# Altium PCB LCD_Player_V1.1.PcbDoc
Units mil, origin at the board's own origin, x right, y up, seen from the top; angles counter-clockwise.
Board outline 1495.97 x 2694.13 mil, 2 copper layers (Top Layer, Bottom Layer); 17 components, 17 nets, 53 pads, 14 vias.
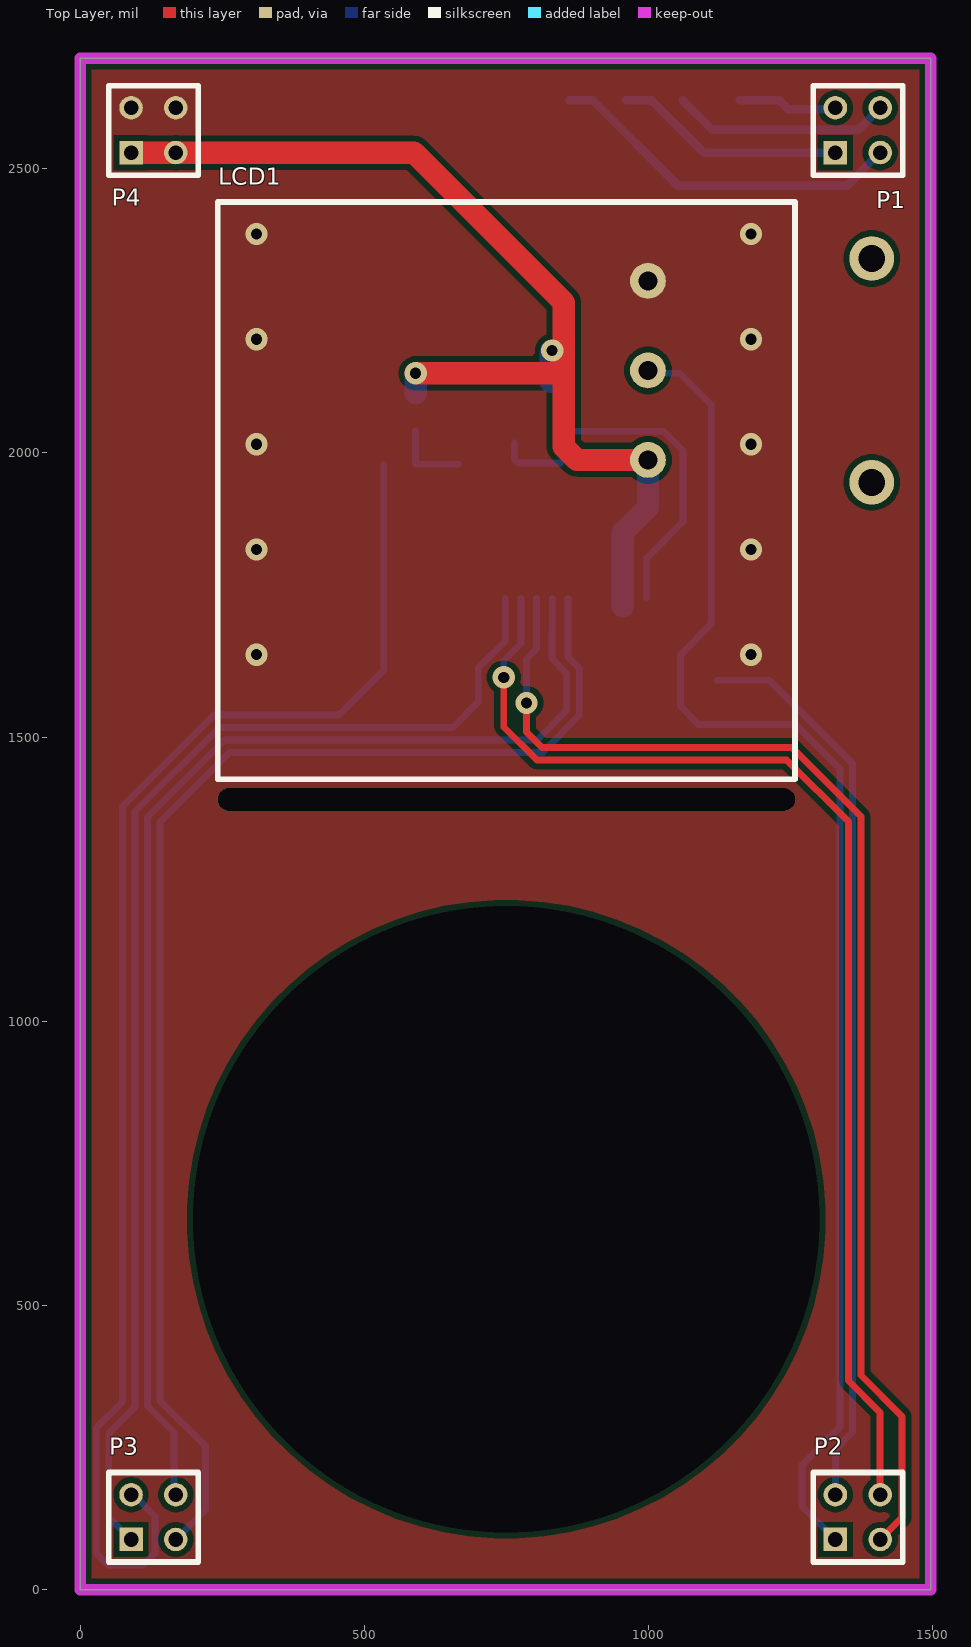
[diagram p0: Top Layer view]
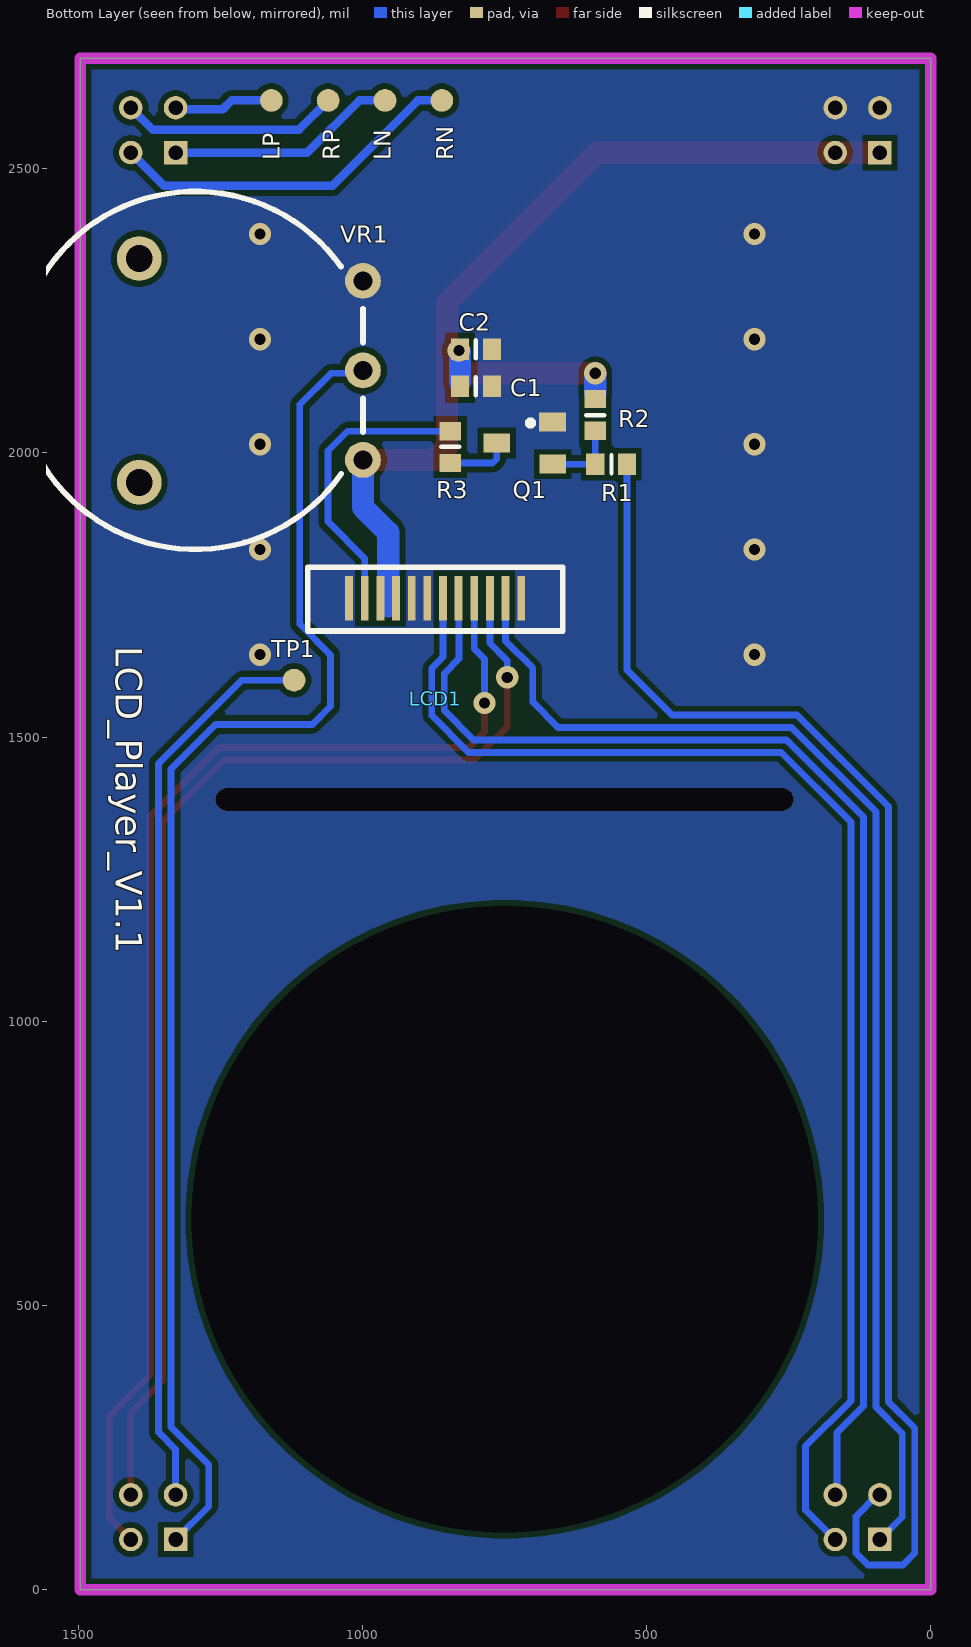
[diagram p1: Bottom Layer view, seen from below]
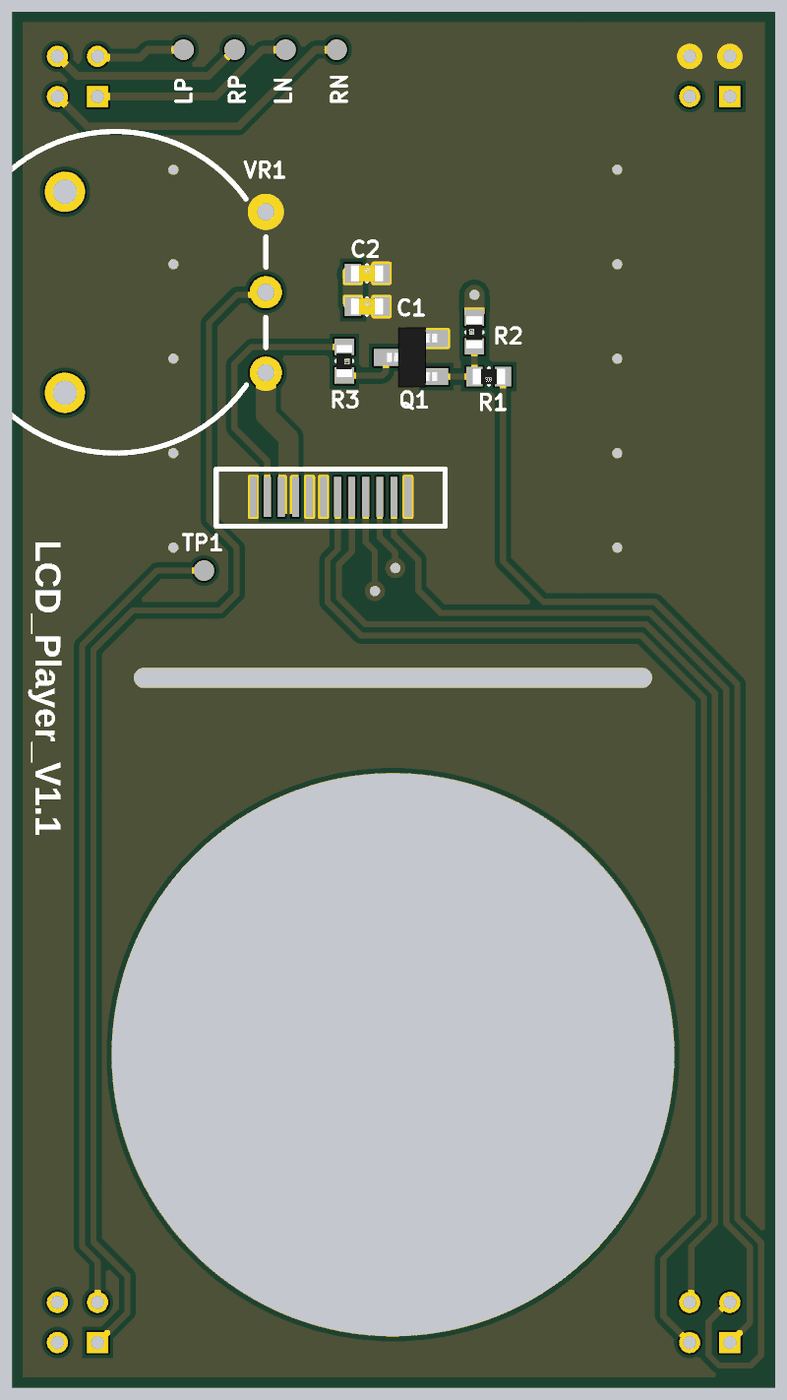
[diagram p2: 3D render of the assembled board from below, using the file's embedded part models]

## Layer stack, top to bottom
Top Solder: solder mask 0.4, Solder Resist, Dk 3.5
Top Layer: signal copper 1.4
Dielectric 1: dielectric 12.6, FR-4, Dk 4.8
Bottom Layer: signal copper 1.4
Bottom Solder: solder mask 0.4, Solder Resist, Dk 3.5

## Board outline
0.07,-0.03 0.07,2694.1 1496.04,2694.1 1496.04,-0.03

## Design rules (kind name [scope] priority, off if disabled: settings)
Clearance [All] p1: gap=10 ignorepadtopadclearanceinfootprint=FALSE
PolygonConnect [All] p1: connectstyle=Direct reliefconductorwidth=10 reliefentries=4 polygonreliefangle="90 Angle" airgapwidth=10
RoutingVias [All] p1: holewidth=19.68 width=39.37 viastyle="Through Hole" minholewidth=15.75 minwidth=31.5 maxholewidth=28 maxwidth=50
SolderMaskExpansion [All] p1: expansion=4 istentingtop=FALSE
Width [All] p1: maxlimit=39.37 minlimit=8 preferedwidth=10
30 further rules are at their usual default settings.

## Components (designator, comment, footprint, x,y, rotation, side; value= is the part's Value field where it differs from the comment)
C1 "100nF" "Cap 0603" 800,2115 r180 bottom
C2 "1uF" "Cap 0603" 800,2180 r180 bottom
LCD1 "LCD 1.3\" 240 X 240 IPS DISPLAY" "LCD 1.3inch IPS HD" 749.53,1390 r0 top locked
LN "TP" TP 960,2620 r0 bottom (schematic designator TP2)
LP "TP" TP 1160,2620 r0 bottom (schematic designator TP3)
P1 "Header 2x2" "Header 2mm 2x2" 1368,2567.26 r0 top locked
P2 "Header 2x2" "Header 2mm 2x2" 1368,127.26 r0 top locked
P3 "Header 2x2" "Header 2mm 2x2" 128.78,127.26 r0 top locked
P4 "Header 2x2" "Header 2mm 2x2" 128.78,2567.26 r0 top locked
Q1 "C1815" SOT23B 714.21,2017.4 r90 bottom
R1 "1k-1%" "Res 0603" 562,1980 r0 bottom
R2 "10k-1%" "Res 0603" 590,2067 r90 bottom
R3 "10R-1%" "Res 0603" 845,2010 r270 bottom
RN "TP" TP 860,2620 r0 bottom (schematic designator TP4)
RP "TP" TP 1060,2620 r0 bottom (schematic designator TP5)
TP1 "TP" TP 1120,1600 r90 bottom
VR1 "100k" "Adjust Resistor Wheel" 1294.06,2145 r90 bottom locked

## Footprints (in the part's own frame and the unit in brackets; to place one, negate y for a bottom-side part, rotate by r counter-clockwise, add the part's x,y. Pads: shape width x height; smd on the part's side, far side on the other; paste and mask are expansions set on the pad)
"Adjust Resistor Wheel" [mm] "Adjust Resistor Wheel"
  round 1.6 hole 0.85: 1(-4,-7.5) 2(0,-7.5) 3(4,-7.5)
  round 2 hole 1.2: ""(-5,2.5) ""(5,2.5)
  silkscreen extent -8,-7.5 8,8, body extent -8,-8 8,8, height 1.27
"Cap 0603" [mil] "Cap 0603"
  rect 32x38 smd: 1(-28,2) 2(28,2)
  silkscreen extent 0,-14 0,18, body extent -32,-14 31,18, height 12
"Header 2mm 2x2" [mm] "Header 2mm 2x2"
  rect 1.05x1.05 hole 0.65: 1(-1.004,-0.991)
  round 1.05 hole 0.65: 2(-1.004,1.009) 3(0.996,-0.991) 4(0.996,1.009)
  silkscreen extent -2,-2 2,2
"LCD 1.3inch IPS HD" [mm] "LCD 1.3inch IPS HD"
  rect 0.35x2 smd far side: 1(6.955,9) 2(6.255,9) 3(5.555,9) 4(4.855,9) 5(4.155,9) 6(3.455,9) 7(2.755,9) 8(2.055,9) 9(1.355,9) 10(0.655,9) 11(-0.045,9) 12(-0.745,9)
  oval 25.8x1 hole 25.8 slot 1 at 90 deg mask+0.102: 12(0,0)
  silkscreen extent -12.9,0.91 12.9,26.71, body extent -12.93,0.99 12.87,26.79, height 1.5
"Res 0603" [mil] "Res 0603"
  rect 32x38 smd: 1(-28,0) 2(28,0)
  silkscreen extent 0,-16 0,16, body extent -32,-16 31,16, height 12
SOT23B [mm] "SOT 23B"
  rect 0.85x1.2 smd: 1(0.94,-1.245) 2(0,1.25) 3(-0.95,-1.25)
  silkscreen extent 0.77,-0.38 1.02,-0.13, body extent -1.5,-1.3 1.5,1.2, height 1.06
TP [mil] "TP"
  round 40 smd: 1(0,0)

## Part data
C1 C2: library part Cap, "Cap SMD"
LCD1: "This is a general LCD display Module, IPS screen, 1.3inch diagonal, 240*240 / resolution, with embedded controller, communicating via SPI interface"
Q1: "NPN 600mW, ECB"
R1 R2 R3: library part Res, "Res SMD"
VR1: library part "Res Adjust", "Adjust Resistor"

## Free pads (board coordinates)
  round 1062.99 / inner round 39.37 / far side round 39.37 hole 1102.36 paste-4: ""(749.53,652)

## Via types
v1: diameter 39.37, hole 19.68, Top Layer to Bottom Layer, tented both sides, 14 vias

## Nets (pads, with @x,y where several pads share a name; then routed paths per layer and width w, separated by ;. In a path a pad name is that pad's centre, name@x,y a point inside that pad or via, vN(x,y) a via of type N, cw(c..) or ccw(c..) an arc to the next point about the centre after c; other vN are vias at no path point)
3V3: C1.1 C2.1 LCD1.3 LCD1.4 P4.1 P4.3 R2.2 VR1.1 | length 1909.7
  Top Layer w39.37: P4.1 P4.3 586.74,2528.26 850.86,2264.14 850.86,2139.62 ; v1(590,2140) 850.48,2140 850.86,2139.62 ; VR1.1 873.93,1987.52 850.86,2010.58 850.86,2139.62
  Bottom Layer w39.37: R2.2@590,2105 v1(590,2140) ; C1.1@828,2125 828,2178 v1(830,2180) ; 954.56,1730 954.56,1860 998.78,1904.22 VR1.1
GND: C1.2 C2.2 LCD1.1 LCD1.5 LCD1.6 LCD1.12 P4.2 P4.4 Q1.1 VR1.3
  other v1: 310,1645 1180,1645 310,1830 1180,1830 310,2015 1180,2015 310,2200 1180,2200 310,2385 1180,2385
LCD_BL: P3.2 R1.1 | length 2497.2
  Bottom Layer w12: P3.2 93.33,167 131.32,129.01 131.32,64.13 110.61,43.42 48.75,43.42 28,64.17 28,284.06 74.46,330.52 74.46,1377.85 235.57,1538.96 455.11,1538.96 534,1617.85 R1.1
LCD_CS: LCD1.8 P3.4 | length 2236.4
  Bottom Layer w12: P3.4 165,170 165,276.43 118.46,322.97 118.46,1359.63 253.79,1494.96 803.93,1494.96 855.76,1546.79 855.76,1612.07 830,1637.82 830,1685 830.44,1685.44 LCD1.8
LCD_DC: LCD1.7 P3.3 | length 2346.4
  Bottom Layer w12: P3.3 220,140.26 220,252.54 140.46,332.08 140.46,1350.51 262.9,1472.96 813.04,1472.96 877.76,1537.67 877.76,1621.18 858,1640.94 LCD1.7
LCD_RST: LCD1.11 P3.1 | length 2202
  Bottom Layer w12: P3.1 50,127.52 50,274.95 96.46,321.4 96.46,1368.74 244.68,1516.96 655.56,1516.96 700,1561.4 700,1621.18 747.76,1668.94 LCD1.11
LED_K: LCD1.2 R3.1 | length 515.9
  Bottom Layer w12: R3.1 1026.22,2038 1060.48,2003.74 1060.48,1878.94 995.79,1814.25 LCD1.2
NetQ1_2: Q1.2 R3.2 | length 112.9
  Bottom Layer w12: Q1.2 763.43,1989.03 770.46,1982 R3.2
NetQ1_3: Q1.3 R1.2 R2.1 | length 134
  Bottom Layer w12: R2.1 R1.2 Q1.3
SPEAK_LN: LN.1 P1.1 | length 406.5
  Bottom Layer w15: LN.1 1005.15,2620 1096.89,2528.26 P1.1
SPEAK_LP: LP.1 P1.2 | length 175.9
  Bottom Layer w15: LP.1 1230,2620 1245.5,2604.5 1325.98,2604.5 P1.2
SPEAK_RN: P1.3 RN.1 | length 633.5
  Bottom Layer w15: RN.1 902.13,2620 1052.13,2470 1348.96,2470 P1.3
SPEAK_RP: P1.4 RP.1 | length 384.2
  Bottom Layer w15: RP.1 1111.17,2568.83 1369.05,2568.83 P1.4
STM_SPI1_MISO: P2.2 TP1.1 | length 1598.2
  Bottom Layer w12: TP1.1 1211.83,1600 1358.73,1453.1 1358.73,276.97 1328.48,246.72 P2.2
STM_SPI1_MOSI: LCD1.10 P2.4 | length 2121.7
  Top Layer w12: v1(745,1605) 745,1517.94 803.29,1459.66 1242.84,1459.66 1351.35,1351.14 1351.35,367.54 1407.22,311.67 P2.4
  Bottom Layer w12: v1(745,1605) 745,1634.73 775.32,1665.06 LCD1.10
STM_SPI1_SCK: LCD1.9 P2.3 | length 2210.6
  Top Layer w12: v1(785,1560) 785,1509.06 812.4,1481.66 1251.95,1481.66 1373.35,1360.26 1373.35,377.2 1445.72,304.83 1445.72,126.76 P2.3
  Bottom Layer w12: v1(785,1560) 785,1637.32 802.88,1655.2 LCD1.9
VOLUME: P2.1 VR1.2 | length 2423.5
  Bottom Layer w12: VR1.2 1003.78,2140 1055,2140 1110,2085 1110,1698.73 1055.79,1644.52 1055.79,1554.21 1087.78,1522.22 1258.5,1522.22 1336.73,1443.99 1336.73,286.09 1270,219.35 1270,146.74 P2.1
pads on no net: VR1.

## Polygon pours and split planes (outlines as drawn)
GND on Top Layer "GND_TOP" (solid, remove dead copper, pour order 0): 0,2695 1495,2695 1495,0 0,0
GND on Bottom Layer "GND_BOTTOM" (solid, remove dead copper, pour order 1): 0,2695 1495,2695 1495,0 0,0

## Keep-outs
Keep-Out Layer:
  the board outline again, w20

## Silkscreen, mask and mechanical layers (free items; w line width, h text height)
Bottom Overlay:
  text "LCD_Player_V1.1" at 1449.96,1660 h80 r90